# EAGLE board Qwiic_Spectral_Sensor-AS7265x-Offset-TopJig (EAGLE 9.2.1)

Size 48.28 x 53.34 mm. Coordinates in mm from the lower left corner, seen from the top.
Outline: 5.86,45.72 arc-180 7.64,47.5 40.66,47.5 arc-180 42.44,45.72 42.44,7.62 arc-180 40.66,5.84 7.64,5.84 arc-180 5.86,7.62 5.86,10.16 arc100 3.32,12.7 2.56,12.7 arc80 0.02,8.89 0.02,2.54 arc80 2.56,0 45.74,0 arc80 48.28,2.54 48.28,50.8 arc80 45.74,53.34 2.56,53.34 arc80 0.02,50.8 0.02,43.18 arc80 2.56,40.64 3.32,40.64 arc100 5.86,43.18 5.86,45.72
Copper layers (1*16): Top 0.035mm / dielectric 1.5mm / Bottom 0.035mm
Design rules "SparkFun-2-layer-PCBWay-LIMIT": minimum track width 6mil, minimum drill 0.3mm, track to track 6mil, track to pad 6mil, pad to pad 6mil, via to via 6mil, smd to smd 6mil, copper to edge 6mil, drill to drill 6mil, minimum pad ring 6mil, minimum via ring 6mil, stop-mask expansion 4mil, vias tented up to drill 25mil, thermal gap 10mil
Net classes: 1 Power: width 0.305 mm

## Footprints (pad centres in the part's own frame; a part is rotated, then mirrored left to right if it is on the bottom)
STAND-OFF-TIGHT = hole 3.048: 0,0
NUBBIN_LOCKER = hole 2.794: 0,0

## Placement (x,y rotation side)
E$1  [STAND-OFF-TIGHT]  3.2,6.35 0 top
E$2  [STAND-OFF-TIGHT]  3.2,46.99 0 top
E$3  [STAND-OFF-TIGHT]  45.11,6.35 0 top
E$4  [STAND-OFF-TIGHT]  45.11,46.99 0 top
E$5  [NUBBIN_LOCKER]  24.15,2.03 0 top
E$6  [NUBBIN_LOCKER]  24.15,51.31 0 top
FRAME1  FRAME-LETTER  [CREATIVE_COMMONS]  -5.06,-24.13 0 top  (outside the outline)

## Library data of the parts
E$1-E$6 = SparkFun-Hardware
FRAME1 = SparkFun-Aesthetics

## Text on the board
Top: Up-TopLayer
Bottom: Down-TopLayer
tPlace: #674 | Spectral Triad | SEN-15050
tDocu: Nathan Seidle